# Altium PCB 1.47 LCD .PcbDoc
Units mm, origin at the board's own origin, x right, y up, seen from the top; angles counter-clockwise.
Board outline 45.11 x 20.23 mm, 2 copper layers (Top Layer, Bottom Layer), stack 1.471 mm thick; 10 components, 11 nets, 41 pads, 14 vias.
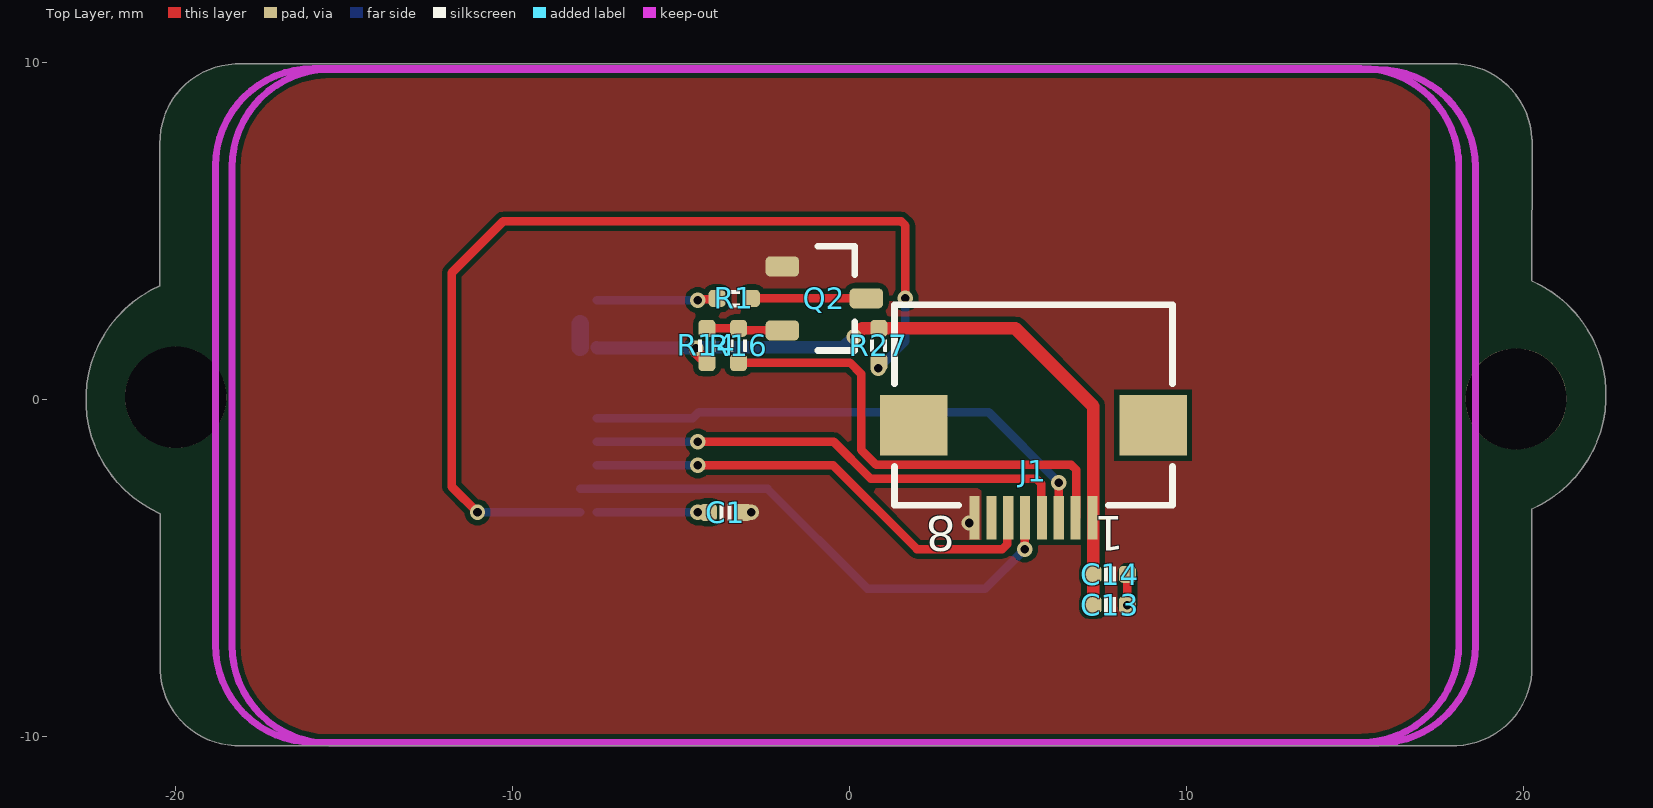
[diagram p0: Top Layer view]
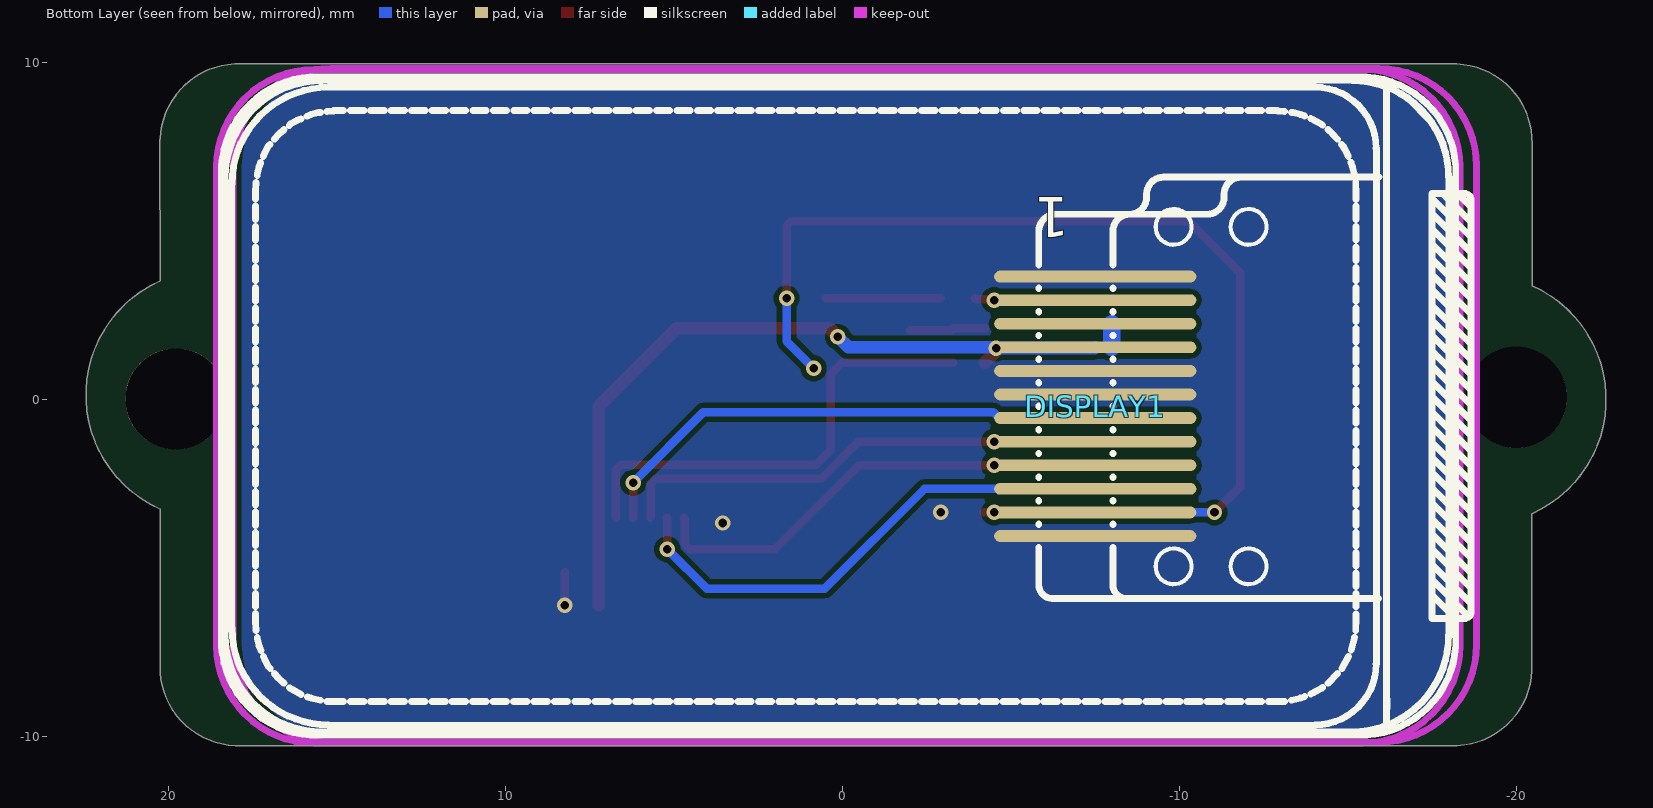
[diagram p1: Bottom Layer view, seen from below]
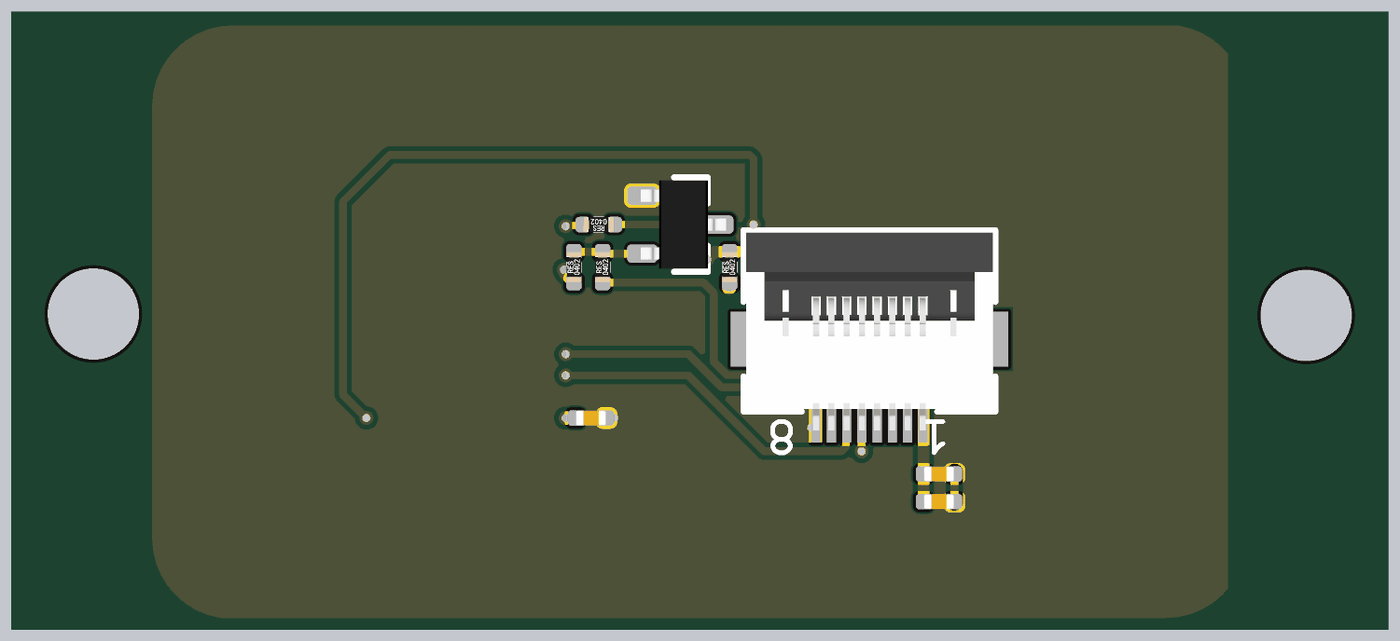
[diagram p2: 3D render of the assembled board from above, using the file's embedded part models]

## Layer stack, top to bottom
Top Solder: solder mask 0.0102, Solder Resist, Dk 3.5
Top Layer: signal copper 0.0356
Dielectric 1: dielectric 1.4, FR-4, Dk 4.8
Bottom Layer: signal copper 0.0356
Bottom Solder: solder mask 0.0102, Solder Resist, Dk 3.5

## Board outline
-20.454,-3.389 cw(c-18.951,-0.005) -20.459,3.377 -20.456,3.38 -20.456,7.586 cw(c-18.133,7.634) -18.226,9.957 -18.221,9.957 17.83,9.957 17.843,9.958 cw(c17.935,7.636) 20.258,7.729 20.266,7.729 20.259,3.522 20.266,3.515 cw(c18.758,0.133) 20.261,-3.251 20.26,-3.296 20.26,-7.901 20.261,-7.901 cw(c17.938,-7.95) 18.031,-10.272 18.026,-10.272 -18.024,-10.272 -18.037,-10.274 cw(c-18.13,-7.952) -20.452,-8.045 -20.454,-8.043

## Design rules (kind name [scope] priority, off if disabled: settings)
Clearance [All] p1: gap=0.152 ignorepadtopadclearanceinfootprint=FALSE
MinimumSolderMaskSliver [All] p1: minsoldermaskwidth=0.102
PlaneConnect [All] p1: planeconnectstyle=Direct reliefexpansion=0.508 reliefentries=4 reliefconductorwidth=0.254 reliefairgap=0.254
PolygonConnect [All] p1: connectstyle=Direct reliefconductorwidth=0.254 reliefentries=4 polygonreliefangle="90 Angle" airgapwidth=0.254
RoutingVias [All] p1: holewidth=0.254 width=0.457 viastyle="Through Hole" minholewidth=0.254 minwidth=0.457 maxholewidth=0.254 maxwidth=0.457
SilkToSilkClearance [All] p1: silktosilkclearance=0
SilkToSolderMaskClearance [IsPad] p1: minsilkscreentomaskgap=0 clearancetoexposedcopper=TRUE
SolderMaskExpansion [All] p1: expansion=0.102 istentingtop=FALSE
Width [All] p1: maxlimit=0.508 minlimit=0.127 preferedwidth=0.254
26 further rules are at their usual default settings.

## Classes and differential pairs
component class "1.47 LCD": C1 J1 Q2 R1 R14 R16 R27

## Components (designator, comment, footprint, x,y, rotation, side; value= is the part's Value field where it differs from the comment)
C1 "0.1uF" CAP_0402 -3.667,-3.35 r180 top value=0.1u
C13 "0.1uF" CAP_0402 7.747,-6.096 r180 top value=0.1u
C14 "0.1uF" CAP_0402 7.747,-5.189 r180 top value=0.1u
DISPLAY1 "TFT LCD 1.47 ZJY" "ZJY 1.47‘’ TFT LCD" -7.493,-0.203 r90 bottom
J1 "FPC 8Pin" "FPC 0.5MM 8P 1.0H" 5.467,-0.162 r180 top
Q2 "S8050" SOT23-3 -0.739,3 r0 top
R1 "10R" RES_0402 -3.413,3 r180 top value=22R
R14 "10K" RES_0402 -4.225,1.603 r90 top value=22R
R16 "1K" RES_0402 -3.286,1.603 r90 top value=22R
R27 "10K" RES_0402 0.878,1.603 r90 top value=22R

## Footprints (in the part's own frame and the unit in brackets; to place one, negate y for a bottom-side part, rotate by r counter-clockwise, add the part's x,y. Pads: shape width x height; smd on the part's side, far side on the other; paste and mask are expansions set on the pad)
CAP_0402 [mil]
  rrect50% 20x20 smd: 1(-20,0) 2(20,0)
  silkscreen extent -7,-9 7,9, body extent -20,-10 20,10, height 20
"FPC 0.5MM 8P 1.0H" [mm] "FPC 连接器"
  rect 0.3x1.3 smd: 1(-1.75,3.35) 2(-1.25,3.35) 3(-0.75,3.35) 4(-0.25,3.35) 5(0.25,3.35) 6(0.75,3.35) 7(1.25,3.35) 8(1.75,3.35)
  rect 2x1.8 smd: MP1(-3.55,0.6) MP2(3.55,0.6)
  silkscreen extent -4.13,-2.98 4.13,2.98, body extent -4.05,-2.9 4.05,3.6, height 2.25
RES_0402 [mil]
  rrect50% 20x20 smd: 1(-20,0) 2(20,0)
  silkscreen extent -7,-10 7,10, body extent -20,-10 20,10, height 14
SOT23-3 [mm]
  rrect50% 1x0.6 smd: 1(-1.246,0.95) 2(-1.246,-0.95) 3(1.246,0)
  silkscreen extent -0.2,-1.55 0.9,1.55, body extent -1.3,-1.45 1.5,1.45, height 1.2
"ZJY 1.47‘’ TFT LCD" [mm] "中景园1.47寸屏幕"
  oval 0.35x6 smd: 1(3.85,0) 2(3.15,0) 3(2.45,0) 4(1.75,0) 5(1.05,0) 6(0.35,0) 7(-0.35,0) 8(-1.05,0) 9(-1.75,0) 10(-2.45,0) 11(-3.15,0) 12(-3.85,0)
  Keep-Out Layer lines w0.203: -7.1,-10.825 cw(c-7.1,-7.925) -10,-7.925 -10,23.175 cw(c-7.1,23.175) -7.1,26.075 7.1,26.075 cw(c7.1,23.175) 10,23.175 10,-7.925 cw(c7.1,-7.925) 7.1,-10.825 -7.1,-10.825
  silkscreen extent -9.76,-11.16 9.78,25.93, body extent -9.61,-10.53 9.78,25.75, height 1.56

## Part data
C1 C13 C14: library part 电容-0402, "Capacitor"
DISPLAY1: "中景园1.47屏幕"
Q2: "NPN"
R1 R14 R16 R27: library part 电阻-0402, "Resistor"

## Free pads (board coordinates)
  round 3 hole 3 unplated: 8(-19.987,0.065) 8(19.789,0.016)

## Via types
v1: diameter 0.457, hole 0.254, Top Layer to Bottom Layer, tented both sides, 14 vias

## Nets (pads, with @x,y where several pads share a name; then routed paths per layer and width w, separated by ;. In a path a pad name is that pad's centre, name@x,y a point inside that pad or via, vN(x,y) a via of type N, cw(c..) or ccw(c..) an arc to the next point about the centre after c; other vN are vias at no path point)
BLight: J1.2 R16.1 | length 14.1
  Top Layer w0.254: R16.1 0.018,1.095 0.356,0.758 0.356,-1.496 0.801,-1.941 6.591,-1.941 6.74,-2.09 6.74,-3.489 J1.2
GND: C1.1 C13.1 C14.1 DISPLAY1.1 DISPLAY1.5 DISPLAY1.6 DISPLAY1.12 J1.8 Q2.1 | length 1
  Top Layer w0.254: v1(8.248,-6.111) 8.255,-6.104 C14.1@8.255,-5.13
  other v1: 3.56,-3.667 -2.905,-3.35
LCD_CS: DISPLAY1.8 J1.4 | length 14.7
  Top Layer w0.254: v1(-4.493,-1.253) -0.462,-1.253 0.633,-2.348 5.546,-2.348 5.695,-2.497 5.695,-3.49 J1.4
  Bottom Layer w0.254: DISPLAY1.8 v1(-4.493,-1.253)
LCD_DC: DISPLAY1.7 J1.3 | length 15.7
  Top Layer w0.254: J1.3 6.219,-3.51 6.219,-2.477 v1(6.22,-2.476)
  Bottom Layer w0.254: DISPLAY1.7 -4.643,-0.553 -4.471,-0.381 4.137,-0.381 6.22,-2.464 v1(6.22,-2.476)
LCD_RST: C1.2 DISPLAY1.11 R27.1 | length 32.5
  Top Layer w0.254: v1(-11.033,-3.35) -11.795,-2.588 -11.795,3.762 -10.271,5.286 1.54,5.286 1.667,5.159 v1(1.667,3) ; v1(-4.493,-3.353) v1(-4.493,-3.353) -4.177,-3.351 C1.2
  Bottom Layer w0.254: v1(-11.033,-3.35) -11.03,-3.353 DISPLAY1.11@-7.985,-3.353 ; DISPLAY1.11 v1(-4.493,-3.353) ; v1(0.864,0.925) 1.667,1.728 v1(1.667,3)
LCD_SCL: DISPLAY1.9 J1.6 | length 14.1
  Top Layer w0.254: v1(-4.493,-1.953) -0.478,-1.953 2.01,-4.441 4.545,-4.441 4.694,-4.293 4.694,-3.535 J1.6
  Bottom Layer w0.254: DISPLAY1.9 v1(-4.493,-1.953)
LCD_SDA: DISPLAY1.10 J1.5 | length 15.8
  Top Layer w0.254: v1(5.207,-4.445) 5.207,-3.522 J1.5
  Bottom Layer w0.254: DISPLAY1.10@-7.985,-2.653 -2.426,-2.653 0.541,-5.62 4.032,-5.62 v1(5.207,-4.445)
NetDISPLAY1_2: DISPLAY1.2 R1.2 | length 3.6
  Top Layer w0.254: v1(-4.493,2.947) -4.467,2.974 -3.948,2.974 R1.2
  Bottom Layer w0.254: DISPLAY1.2 v1(-4.493,2.947)
NetQ2_2: Q2.2 R14.2 R16.2 | length 2.3
  Top Layer w0.254: R14.2 R16.2 -3.225,2.05 Q2.2@-1.992,2.05
NetQ2_3: Q2.3 R1.1 | length 3.4
  Top Layer w0.254: R1.1 Q2.3@0.5,3
VCC_3V3: C13.2 C14.2 DISPLAY1.3 DISPLAY1.4 J1.1 R14.1 R27.2 | length 23.1
  Top Layer w0.381: v1(-4.549,1.516) -4.535,1.502 -4.535,1.405 R14.1 ; v1(0.143,1.857) 0.397,2.111 R27.2 4.925,2.111 7.24,-0.205 J1.1@7.24,-3.489 ; C13.2 C14.2 J1.1@7.239,-3.534
  Bottom Layer w0.381: DISPLAY1.4 -7.478,1.532 -4.585,1.532 -4.57,1.516 v1(-4.549,1.516) ; DISPLAY1.4@-4.547,1.547 -4.53,1.531 -4.481,1.531 -4.464,1.547 -0.167,1.547 v1(0.143,1.857)
  Bottom Layer w0.508: DISPLAY1.4@-7.985,1.547 DISPLAY1.3@-7.985,2.247
pads on no net: J1.7 J1.MP1 J1.MP2

## Polygon pours and split planes (outlines as drawn)
GND on Bottom Layer "GND_L02_P000" (solid, remove dead copper, pour order 0): -19.714,9.953 -19.714,-10.875 18.767,-10.875 18.767,9.953
GND on Top Layer "GND_L01_P002" (solid, remove dead copper, pour order 2): 17.226,10.225 17.226,-10.603 -21.255,-10.603 -21.255,10.225

## Keep-outs
Keep-Out Layer:
  lines w0.203: 18.09,-7.275 cw(c15.19,-7.275) 15.19,-10.175 -15.91,-10.175 cw(c-15.91,-7.275) -18.81,-7.275 -18.81,6.925 cw(c-15.91,6.925) -15.91,9.825 15.19,9.825 cw(c15.19,6.925) 18.09,6.925 18.09,-7.275

## Silkscreen, mask and mechanical layers (free items; w line width, h text height)
Mechanical 1:
  lines w0.2: -20.459,3.377 ccw(c-18.951,-0.005) -20.454,-3.389 -20.454,-8.043 ; -20.456,3.38 -20.456,7.586 cw(c-18.133,7.634) -18.226,9.957 ; -20.452,-8.045 ccw(c-18.13,-7.952) -18.037,-10.274 ; -18.221,9.957 17.83,9.957 ; -18.024,-10.272 18.026,-10.272 ; 17.843,9.958 cw(c17.935,7.636) 20.258,7.729 ; 18.031,-10.272 ccw(c17.938,-7.95) 20.261,-7.901 ; 20.259,3.522 20.266,7.729 ; 20.26,-7.901 20.26,-3.296 ; 20.261,-3.251 ccw(c18.758,0.133) 20.266,3.515

## Text inside footprints (layer, text, board x,y; h text height)
DISPLAY1: Bottom Overlay "1" at -6.718,6.397 h2.03 r180
J1: Top Overlay "1" at 8.167,-3.462 h1.02 r180; Top Overlay "8" at 3.167,-3.462 h1.02 r180